# Altium PCB Simple_Project.PcbDoc
Units mm, origin at the board's own origin, x right, y up, seen from the top; angles counter-clockwise.
Board outline 27.06 x 19.57 mm, 2 copper layers (Top Layer, Bottom Layer); 4 components, 4 nets, 8 pads, 0 vias.
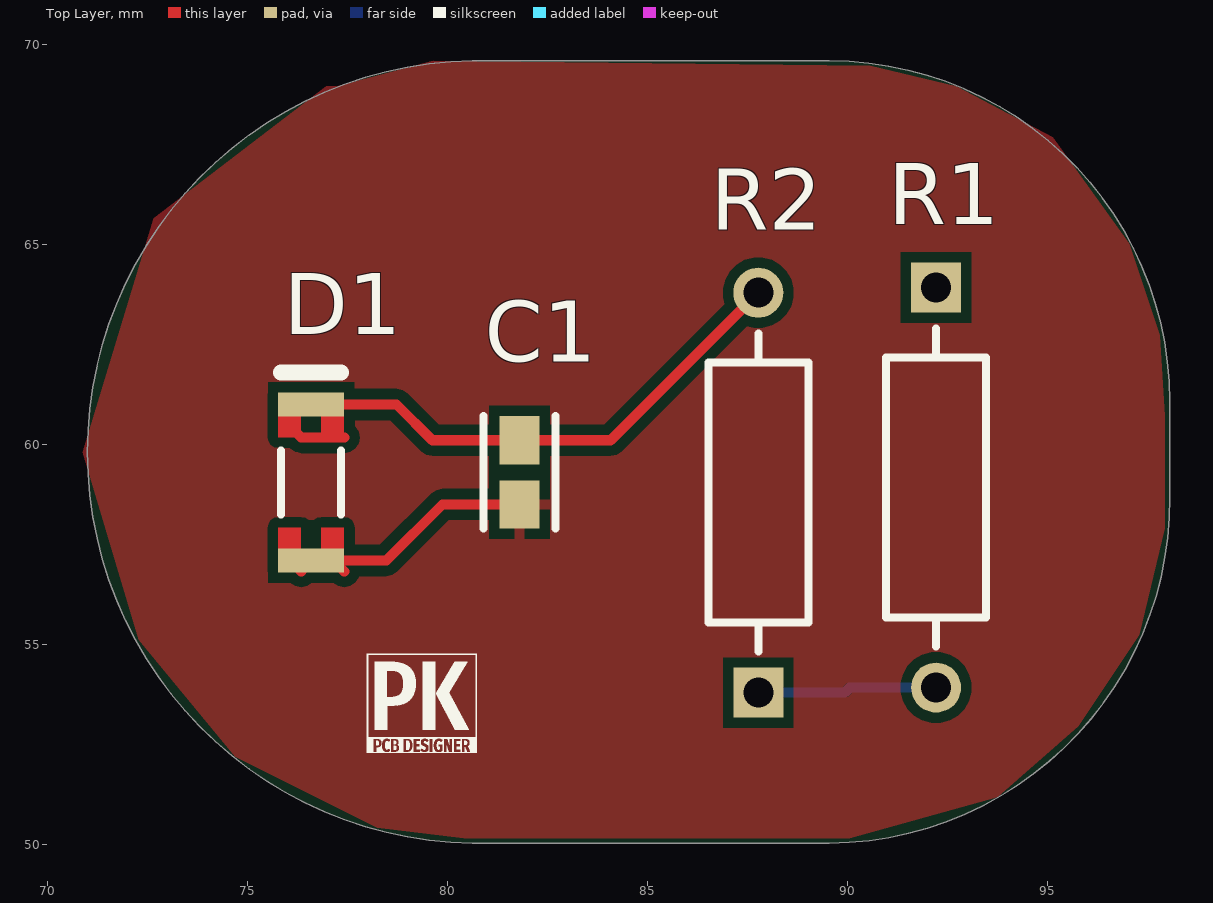
[diagram p0: Top Layer view]
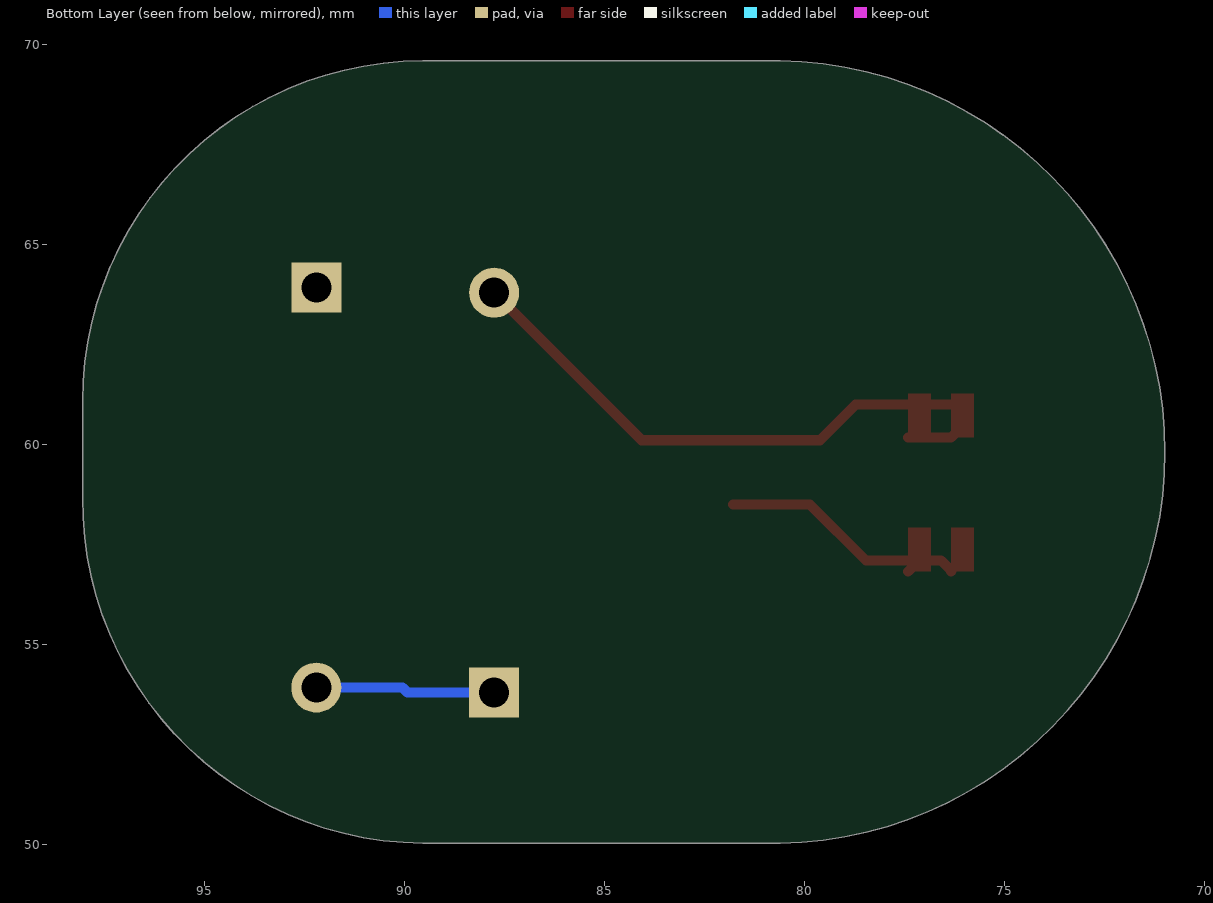
[diagram p1: Bottom Layer view, seen from below]
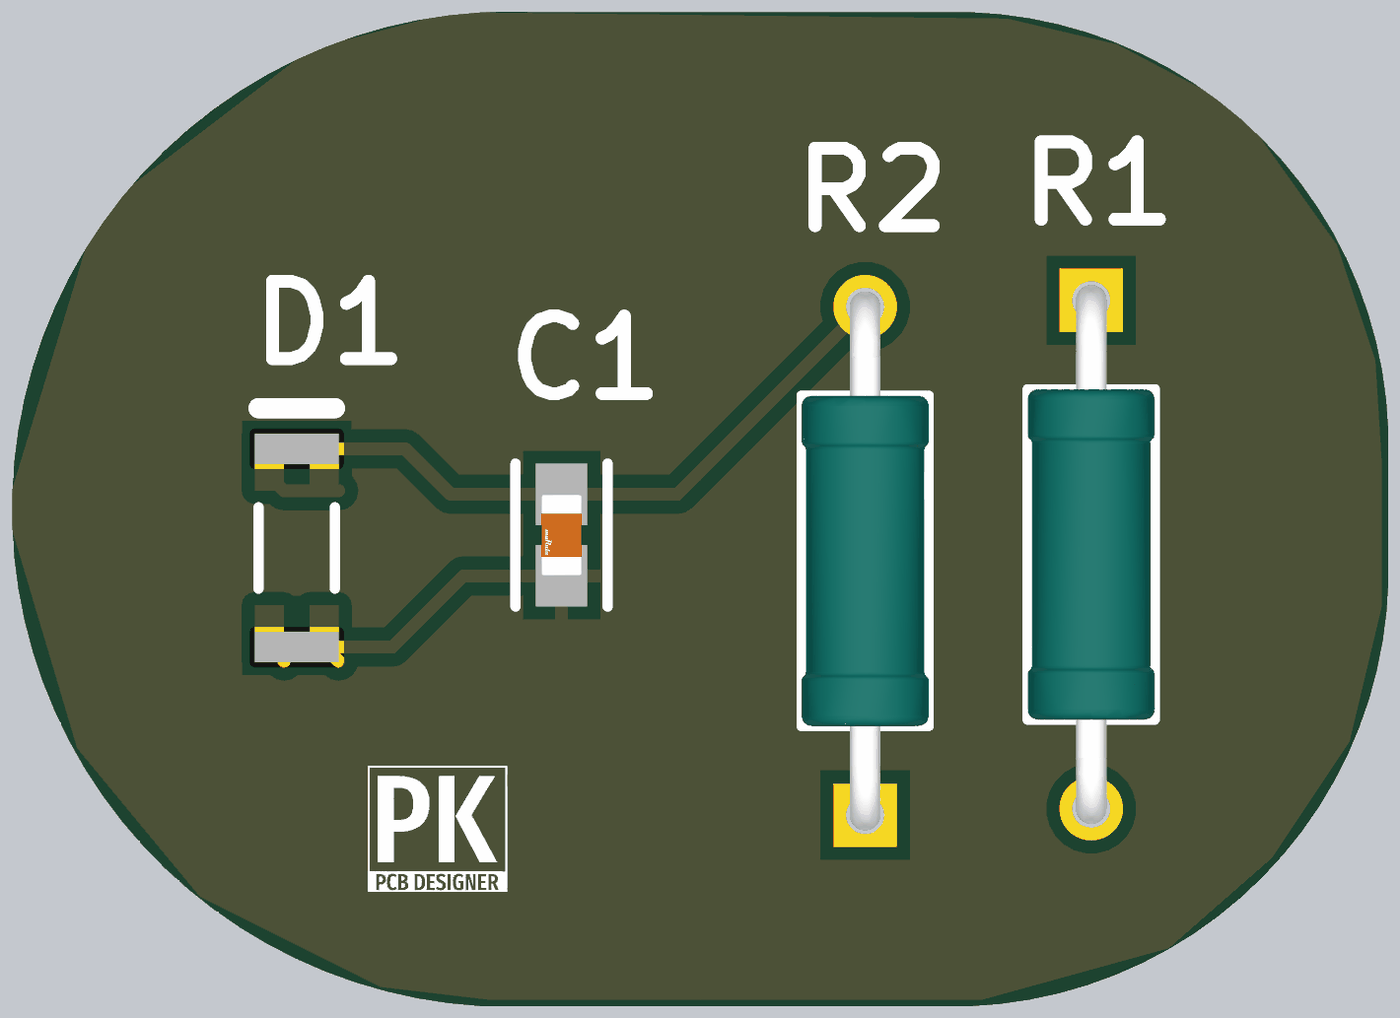
[diagram p2: 3D render of the assembled board from above, using the file's embedded part models]

## Layer stack, top to bottom
Top Solder: solder mask 0.0102, Solder Resist, Dk 3.5
Top Layer: signal copper 0.0356
Dielectric 1: dielectric 0.32, FR-4, Dk 4.8
Bottom Layer: signal copper 0.0356
Bottom Solder: solder mask 0.0102, Solder Resist, Dk 3.5

## Board outline
81.153,50.038 89.535,50.038 ccw(c89.471,58.61) 98.044,58.674 98.044,61.087 ccw(c89.535,61.087) 89.535,69.596 81.152,69.596 ccw(c80.772,59.817)

## Design rules (kind name [scope] priority, off if disabled: settings)
Clearance [All] p1: gap=0.254 ignorepadtopadclearanceinfootprint=FALSE
PolygonConnect [All] p1: connectstyle=Relief reliefconductorwidth=0.254 reliefentries=4 polygonreliefangle="90 Angle" airgapwidth=0.254
RoutingVias [All] p1: holewidth=0.711 width=1.27 viastyle="Through Hole" minholewidth=0.711 minwidth=1.27 maxholewidth=0.711 maxwidth=1.27
SolderMaskExpansion [All] p1: expansion=0.102 istentingtop=FALSE
Width [All] p1: maxlimit=0.254 minlimit=0.254 preferedwidth=0.254
30 further rules are at their usual default settings.

## Components (designator, comment, footprint, x,y, rotation, side; value= is the part's Value field where it differs from the comment)
C1 "GRM188R60J106ME47D" FP-GRM188-0_1-e0_2_0_55-IPC_A 81.788,59.309 r270 top
D1 "FDLL4148" FAIR-LL-34_V 76.581,59.055 r90 top
R1 "MRS25000C1001FCT00" FP-MRS25-MFG 92.202,58.928 r270 top
R2 "MRS25000C1001FCT00" FP-MRS25-MFG 87.757,58.801 r90 top

## Footprints (in the part's own frame and the unit in brackets; to place one, negate y for a bottom-side part, rotate by r counter-clockwise, add the part's x,y. Pads: shape width x height; smd on the part's side, far side on the other; paste and mask are expansions set on the pad)
FAIR-LL-34_V [mm] "SOD, Body 3.6x1.5 mm"
  rect 0.6x1.65 smd: 1(-1.95,0) 2(1.95,0)
  Top Layer region: 1.125,0.25 2.225,0.25 2.225,0.825 1.125,0.825
  Top Layer region: -2.225,-0.825 -1.125,-0.825 -1.125,-0.25 -2.225,-0.25
  Top Layer region: -2.225,0.25 -1.125,0.25 -1.125,0.825 -2.225,0.825
  Top Layer region: 1.125,-0.825 2.225,-0.825 2.225,-0.25 1.125,-0.25
  silkscreen extent -0.8,-0.75 2.75,0.75, body extent -1.8,-0.75 1.8,0.75, height 1.5
FP-GRM188-0_1-e0_2_0_55-IPC_A [mm]
  rect 1.208x1.012 smd paste+0 mask+0: 1(-0.802,0) 2(0.802,0)
  silkscreen extent -1.41,-0.91 1.41,0.91, body extent -1.91,-1.01 1.91,1.01, height 0.25
FP-MRS25-MFG [mm]
  rect 1.25x1.25 hole 0.75 paste-2539.97 mask+0: 1(-5,0)
  round 1.25 hole 0.75 paste-2539.97 mask+0: 2(5,0)
  silkscreen extent -3.97,-1.25 3.97,1.25, body extent -5.72,-1.35 5.72,1.35, height 0.25

## Part data
C1: library part CMP-2006-02792-2, "Chip Multilayer Ceramic Capacitors for General Purpose, 0603, 10uF, X5R, 15%, 20%, 6.3V", Capacitance=10uF, Case Code (Imperial)=0603, Case Code (Metric)=1608, Dielectric=X5R, Max Operating Temperature=85°C, Min Operating Temperature=-55°C, Package Quantity=4000, Tolerance=20%, Voltage=6.3V, Case/Package=0603, Depth=0.8mm, Height=0.8mm, Lead Free="Lead Free", Length=1.6mm, Material=Ceramic, Mount="Surface Mount", Packaging="Tape and Reel", Radiation Hardening=No, REACH SVHC="No SVHC", Termination=SMD/SMT, Thickness=0.035inch, Voltage Rating=6.3V, Voltage Rating (DC)=6.3V, Width=0.031inch
D1: library part CMP-2000-05112-2, "High Conductance Fast Diode, 500 mW, 100 V, -65 to 175 degC, 2-Pin SMD, RoHS, Tape and Reel", Manufacturer=FairchildSemiconductor, Operating Temperature=-65to175degC, Package=2LL-34, Package Description="2-Leads SOD, Body 3.6x1.5mm", Peak Average Forward Current=0.3A, Peak Forward Voltage=1@0.01AV, Peak Non-Repetitive Surge Current=4A, Peak Reverse Current=5@75VuA, Peak Reverse Repetitive Voltage=100V, Category=Rectifier, Configuration=Single, Datasheet URL=https://datasheet.ciiva.com/8053/30071-8053638.pdf, Datasheet Version=Nov-96, Manufacturer URL=https://www.fairchildsemi.com/, Mounting=SurfaceMount, Package URL=https://www.fairchildsemi.com/package-drawings/SO/SOD80A.pdf, Packaging=Tape&Reel, Peak Reverse Recovery Time=4ns, Rad Hard=No, Type=SmallSignalSwitchingDiode
R1 R2: library part CMP-02408-000051-1, "RES 1K OHM 0.6W 1% AXIAL", Case/Package=Axial, Max Operating Temperature=155°C, Max Power Dissipation=600mW, Min Operating Temperature=-55°C, Package Quantity=5000, Resistance=1kR, Resistance Tolerance=1%, Resistor Type="Metal Film", Temperature Coefficient=50ppm/°C, Voltage Rating=350V, Construction=Cylindrical, Contact Plating=Tin, Diameter=2.5mm, Lead Diameter=0.6mm, Lead Free="Lead Free", Length=6.5mm, Military Standard=Not, Mount="Through Hole", Number of Pins=2, Number of Terminations=2, Packaging="Tape and Reel", Power Rating=600mW, Radiation Hardening=No, RoHS Compliant=Yes, Series=MRS25, Technology="THIN FILM", Termination=Axial, Tolerance=1%, Voltage Rating (DC)=350V, Weight=0.00776oz, Width=2.5mm

## Nets (pads, with @x,y where several pads share a name; then routed paths per layer and width w, separated by ;. In a path a pad name is that pad's centre, name@x,y a point inside that pad or via, vN(x,y) a via of type N, cw(c..) or ccw(c..) an arc to the next point about the centre after c; other vN are vias at no path point)
GND: C1.2 D1.1 | length 6.6
  Top Layer w0.254: D1.1@76.331,56.83 76.319,56.843 D1.1 D1.1@77.114,57.105 ; 77.406,56.83 77.137,57.099 77.12,57.099 D1.1@77.114,57.105 ; C1.2 79.863,58.507 78.461,57.105 D1.1@77.114,57.105
NetC1_1: C1.1 D1.2 R2.2 | length 15.6
  Top Layer w0.254: 77.406,60.18 76.331,60.18 76.044,60.468 76.044,61.005 D1.2 77.119,61.005 78.715,61.005 79.609,60.111 C1.1 84.067,60.111 R2.2
NetR1_1: R1.1
NetR1_2: R1.2 R2.1 | length 4.5
  Bottom Layer w0.254: R2.1 89.916,53.801 90.043,53.928 R1.2

## Polygon pours and split planes (outlines as drawn)
GND on Top Layer "GND_L01_P002" (solid, remove dead copper, pour order 2): 76.962,68.961 72.644,65.659 70.866,59.817 72.263,55.118 74.676,52.197 78.232,50.419 80.391,50.165 90.043,50.165 93.726,51.181 95.758,52.959 97.282,55.245 97.917,57.912 97.917,60.706 97.79,62.738 97.028,65.024 95.123,67.691 92.71,68.961 90.551,69.469 79.629,69.596 77.216,68.961

## Silkscreen, mask and mechanical layers (free items; w line width, h text height)
Top Overlay:
  drawing of 9 lines, arcs and shapes, not listed